# Altium PCB Copy of GAINS_PCB_2.PcbDoc
Units mil, origin at the board's own origin, x right, y up, seen from the top; angles counter-clockwise.
Board outline 1500 x 3000 mil, 2 copper layers (Top Layer, Bottom Layer), stack 61.756 mil thick; 18 components, 62 nets, 152 pads, 17 vias.
Unrouted connection lines stored in the file: 12.
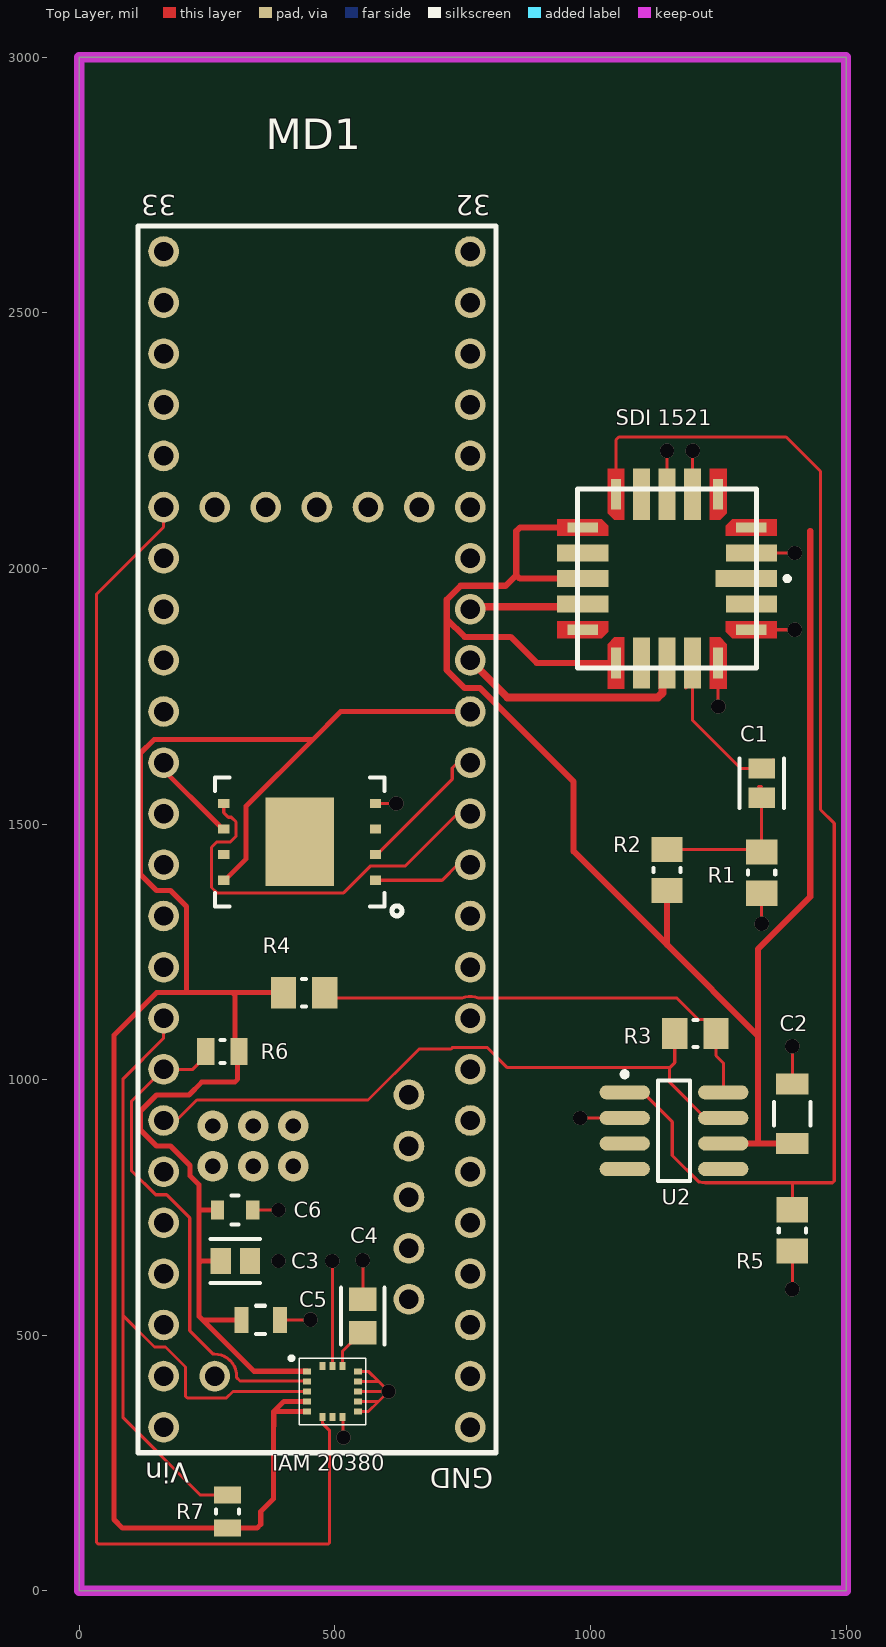
[diagram p0: Top Layer view]
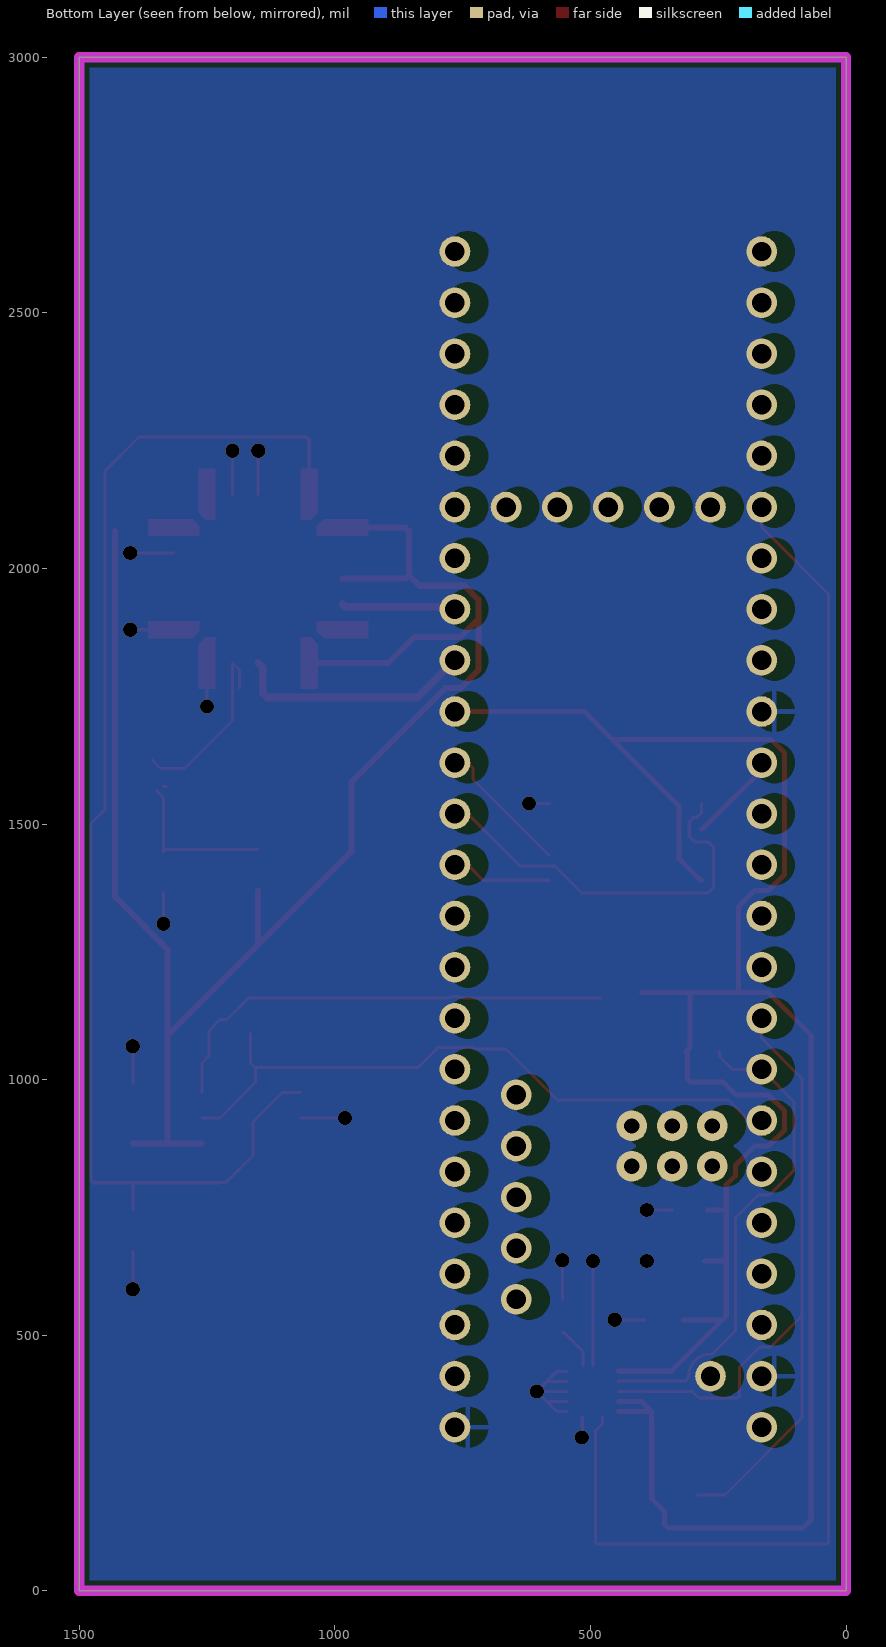
[diagram p1: Bottom Layer view, seen from below]

## Layer stack, top to bottom
Top Solder: solder mask 1, SM-001, Dk 4
Top Layer: signal copper 1.378
Dielectric 1: core 59, Core-043, Dk 4.3
Bottom Layer: signal copper 1.378
Bottom Solder: solder mask 1, SM-001, Dk 4

## Board outline
0,0 1500,0 1500,3000 0,3000

## Design rules (kind name [scope] priority, off if disabled: settings)
BoardOutlineClearance [All] p1: gap=10 ignorepadtopadclearanceinfootprint=FALSE except(0: Arc-SplitContinuation Track-SplitContinuation SMDPad-SplitContinuation THPad-SplitContinuation Via-SplitContinuation Fill-SplitContinuation Poly-SplitContinuation Region-SplitContinuation Text-SplitContinuation)
Clearance [All] p1: gap=10 ignorepadtopadclearanceinfootprint=FALSE except(0: Arc-Hole Track-Hole SMDPad-Hole THPad-Hole Via-Hole Fill-Hole Poly-Hole Region-Hole Text-Hole)
DiffPairsRouting [All] p1: maxlimit=10 minlimit=10 mostfreqgap=10 toplayer_minwidth=15 toplayer_maxwidth=15 toplayer_prefwidth=15 bottomlayer_minwidth=15 bottomlayer_maxwidth=15 bottomlayer_prefwidth=15 maxuncoupledlength=500
PlaneClearance [All] p1: clearance=10
PlaneConnect [All] p1: planeconnectstyle=Direct reliefexpansion=20 reliefentries=4 reliefconductorwidth=10 reliefairgap=10
PolygonConnect [All] p1: thpad.connectstyle=Relief thpad.reliefconductorwidth=10 thpad.reliefentries=4 thpad.polygonreliefangle="90 Angle" thpad.airgapwidth=10 smdpad.connectstyle=Direct smdpad.reliefconductorwidth=10 smdpad.reliefentries=4 smdpad.polygonreliefangle="90 Angle" smdpad.airgapwidth=10 via.connectstyle=Direct via.reliefconductorwidth=10 via.reliefentries=4 via.polygonreliefangle="90 Angle" via.airgapwidth=10
RoutingVias [All] p1: holewidth=13 width=25 viastyle="Through Hole" minholewidth=13 minwidth=25 maxholewidth=60 maxwidth=80
SolderMaskExpansion [All] p1: expansion=4 istentingtop=FALSE
Width [All] p1: maxlimit=100 minlimit=6 preferedwidth=6 minimp=50.000000 maximp=50.000000 favimp=50.000000
27 further rules are at their usual default settings.

## Classes and differential pairs
component class "SDI-1521L - Accelerometer": C1 C2 R1 R2 R3 R4 R5 "SDI 1521" U2
component class "IAM-20380 - Gyroscope": C3 C4 C5 C6 "IAM 20380"
differential pair AO: +AO_P -AO_N

## Components (designator, comment, footprint, x,y, rotation, side; value= is the part's Value field where it differs from the comment)
C1 "0.01uF" FP-GCM21B-0_15-IPC_C 1335,1580 r270 top
C2 "0.1uF" FP-GCM31C-0_2-e0_3_0_8-MFG 1395,933.07 r90 top
C3 "GCM21BR71E225KA73K" FP-GCM21B-0_15-IPC_C 305.31,645 r0 top
C4 "GRM21BR71H474KA88L" FP-GRM21B-0_1-IPC_B 555,537.43 r90 top
C5 "GCM21BR72A104KA37L" FP-GCM21B-0_15-MFG 355,530 r0 top
C6 "GCJ21BR72E103KXJ3L" FP-GCJ21B-0_2-MFG 305,745 r0 top
"IAM 20380" "IAM-20380" "Gyro - IAM20380" 495.2,390 r0 top (schematic designator *)
MD1 "TEENSY 4.1" Teensy4_1 465,2120 r90 top
R1 "5k" RESC2013X50X30ML20T20 1335,1405 r90 top
R2 "5k" RESC2013X50X30ML20T20 1150,1410 r90 top
R3 "5k" RESC2013X50X30ML20T20 1205.35,1090 r0 top
R4 "5k" RESC2013X50X30ML20T20 440,1170 r180 top
R5 "4.7k" RESC2013X60X30ML20T20 1395,705 r90 top
R6 "10k" RESC2013X50X30LL20T20 280,1055 r0 top
R7 "10k" RESC2013X50X30LL20T20 290,155 r270 top
"SDI 1521" "SDI-1521L" "SDI 1521L" 1150,1980 r270 top (schematic designator U1)
U2 "LT1413" LT-S8-8_M 1163.54,900 r0 top
? "GD5F1GQ4UFYIGY" SON127P800X80_HS-9N 431.38,1465 r180 top

## Footprints (in the part's own frame and the unit in brackets; to place one, negate y for a bottom-side part, rotate by r counter-clockwise, add the part's x,y. Pads: shape width x height; smd on the part's side, far side on the other; paste and mask are expansions set on the pad)
FP-GCJ21B-0_2-MFG [mm]
  rect 0.65x0.95 smd paste+0 mask+0: 1(-0.875,0) 2(0.875,0)
  silkscreen extent -0.18,-0.72 0.18,0.72, body extent -1.3,-0.82 1.3,0.82, height 0.25
FP-GCM21B-0_15-IPC_C [mil]
  rect 39.6x51.5 smd paste+0 mask+0: 1(-28.59,0) 2(28.59,0)
  silkscreen extent -48,-43 48,43, body extent -52,-31 52,31, height 10
FP-GCM21B-0_15-MFG [mm]
  rect 0.7x1.3 smd paste+0 mask+0: 1(-0.95,0) 2(0.95,0)
  silkscreen extent -0.23,-0.7 0.23,0.7, body extent -1.4,-0.8 1.4,0.8, height 0.25
FP-GCM31C-0_2-e0_3_0_8-MFG [mm]
  rect 1.05x1.6 smd paste+0 mask+0: 1(-1.475,0) 2(1.475,0)
  silkscreen extent -0.58,-0.9 0.58,0.9, body extent -2.1,-1 2.1,1, height 0.25
FP-GRM21B-0_1-IPC_B [mil]
  rect 45.58x53.63 smd paste+0 mask+0: 1(-32.57,0) 2(32.57,0)
  silkscreen extent -55,-43 55,43, body extent -65,-37 65,37, height 10
"Gyro - IAM20380" [mm]
  rect 0.4x0.3 smd mask+0.05: 1(-1.265,1) 2(-1.265,0.5) 3(-1.265,0) 4(-1.265,-0.5) 5(-1.265,-1) 9(1.265,-1) 10(1.265,-0.5) 11(1.265,0) 12(1.265,0.5) 13(1.265,1)
  rect 0.3x0.4 smd mask+0.05: 6(-0.5,-1.265) 7(0,-1.265) 8(0.5,-1.265) 14(0.5,1.265) 15(0,1.265) 16(-0.5,1.265)
  silkscreen extent -2.1,-1.65 1.65,1.72
LT-S8-8_M [mm] "SOIC, 8-Leads, Body 4.9x3.9mm, Pitch 1.27mm, IPC Low Density"
  oval 2.5x0.7 smd: 1(-2.45,1.905) 2(-2.45,0.635) 3(-2.45,-0.635) 4(-2.45,-1.905) 5(2.45,-1.905) 6(2.45,-0.635) 7(2.45,0.635) 8(2.45,1.905)
  silkscreen extent -2.57,-2.5 0.8,2.93, body extent -2,-2.5 2,2.5, height 1.76
RESC2013X50X30LL20T20 [mm] "Chip Resistor, 2-Leads, Body 2.00x1.25mm, IPC High Density"
  rect 0.85x1.35 smd: 1(-0.825,0) 2(0.825,0)
  silkscreen extent -0.1,-0.58 0.1,0.58, body extent -1.1,-0.72 1.1,0.72, height 0.5
RESC2013X50X30ML20T20 [mm] "Chip Resistor, 2-Leads, Body 2.00x1.25mm, IPC Low Density"
  rect 1.25x1.55 smd: 1(-1.025,0) 2(1.025,0)
  silkscreen extent -0.1,-0.67 0.1,0.67, body extent -1.1,-0.72 1.1,0.72, height 0.5
RESC2013X60X30ML20T20 [mm] "Chip Resistor, 2-Leads, Body 2.00x1.25mm, IPC Low Density"
  rect 1.25x1.55 smd: 1(-1.025,0) 2(1.025,0)
  silkscreen extent -0.1,-0.67 0.1,0.67, body extent -1.1,-0.72 1.1,0.72, height 0.6
"SDI 1521L" [mm]
  rect 0.84x3.05 smd: 1(0,3.935)
  rect 0.84x2.54 smd: 2(-1.27,4.19) 10(-1.27,-4.19) 11(0,-4.19) 12(1.27,-4.19) 20(1.27,4.19)
  rect 0.5x1.524 smd: 3(-2.54,4.19) 9(-2.54,-4.19) 13(2.54,-4.19) 19(2.54,4.19)
  round 0.025 smd: 3(2.54,4.19) 4(4.19,2.54) 8(4.19,-2.54) 9(2.54,-4.19) 13(-2.54,-4.19) 14(-4.19,-2.54) 18(-4.19,2.54) 19(-2.54,4.19)
  rect 1.524x0.5 smd: 4(-4.19,2.54) 8(-4.19,-2.54) 14(4.19,-2.54) 18(4.19,2.54)
  rect 2.54x0.84 smd: 5(-4.19,1.27) 6(-4.19,0) 7(-4.19,-1.27) 15(4.19,-1.27) 16(4.19,0) 17(4.19,1.27)
  Top Layer region: -2.96,5.46 -2.12,5.46 -2.12,2.92 -2.63,2.92 -2.96,3.25
  Top Layer region: -5.46,2.96 -5.46,2.12 -2.92,2.12 -2.92,2.63 -3.25,2.96
  Top Layer region: -5.46,-2.96 -5.46,-2.12 -2.92,-2.12 -2.92,-2.63 -3.25,-2.96
  Top Layer region: -2.96,-5.46 -2.12,-5.46 -2.12,-2.92 -2.63,-2.92 -2.96,-3.25
  Top Layer region: 2.96,-5.46 2.12,-5.46 2.12,-2.92 2.63,-2.92 2.96,-3.25
  Top Layer region: 5.46,-2.96 5.46,-2.12 2.92,-2.12 2.92,-2.63 3.25,-2.96
  Top Layer region: 5.46,2.96 5.46,2.12 2.92,2.12 2.92,2.63 3.25,2.96
  Top Layer region: 2.96,5.46 2.12,5.46 2.12,2.92 2.63,2.92 2.96,3.25
  silkscreen extent -4.45,-4.45 4.45,6.07
SON127P800X80_HS-9N [mm] "SON, 8-Leads, Body 6.00x8.00mm, Pitch 1.27mm, Thermal Pad 3.40x4.30mm, IPC Medium Density"
  rect 0.55x0.45 smd: 1(-3.775,1.905) 2(-3.775,0.635) 3(-3.775,-0.635) 4(-3.775,-1.905) 5(3.775,-1.905) 6(3.775,-0.635) 7(3.775,0.635) 8(3.775,1.905)
  rect 3.4x4.4 smd paste-2.15: 9(0,0)
  silkscreen extent -5.08,-3.2 4.2,3.68, body extent -4.05,-3.05 4.05,3.05, height 0.8
Teensy4_1 [mil] "Mircocontroller"
  round 60 hole 37.99: 0(-1700,-300) 1(-1600,-300) 2(-1500,-300) 3(-1400,-300) 4(-1300,-300) 5(-1200,-300) 6(-1100,-300) 7(-1000,-300) 8(-900,-300) 9(-800,-300) 10(-700,-300) 11(-600,-300) 12(-500,-300) 13(-500,300) 14(-600,300) 15(-700,300) 16(-800,300) 17(-900,300) 18(-1000,300) 19(-1100,300) 20(-1200,300) 21(-1300,300) 22(-1400,300) 23(-1500,300) 24(-300,-300) 25(-200,-300) 26(-100,-300) 27(0,-300) 28(100,-300) 29(200,-300) 30(300,-300) 31(400,-300) 32(500,-300) 33(500,300) 34(400,300) 35(300,300) 36(200,300) 37(100,300) 38(0,300) 39(-100,300) 40(-200,300) 41(-300,300) 42(-1800,300) 43(-1700,300) 44(-1600,300) 45(-400,300) 46(-1800,-300) 47(-400,-300) 48(-1700,200) 55(-1550,-180) 56(-1450,-180) 57(-1350,-180) 58(-1250,-180) 59(-1150,-180) 60(0,200) 61(0,100) 62(0,0) 63(0,-100) 64(0,-200)
  round 60 hole 30: 49(-1289.37,203.54) 50(-1210.63,203.54) 51(-1289.37,124.8) 52(-1210.63,124.8) 53(-1289.37,46.06) 54(-1210.63,46.06)
  silkscreen extent -1850,-350 550,350

## Part data
C1: library part CMP-06035-043554-1, "Ceramic Capacitor for Automotive 10nF ±1% 50VDC X8G 0805 Embossed T/R (GCM21B5G1H103FA16K)"
C2: library part CMP-06035-040557-1, "Ceramic Capacitor for Automotive 100nF ±1% 50VDC C0G 1206 Embossed T/R (GCM31C5C1H104FA16L)"
C3: library part CMP-06035-054411-1, "Ceramic Capacitor for Automotive 2.2uF ±10% 25VDC X7R 0805 Embossed T/R", Capacitance=2.2uF, Case Code (Imperial)=0805, Case Code (Metric)=2012, Dielectric=X7R, Max Operating Temperature=125°C, Min Operating Temperature=-55°C, Package Quantity=10000, Tolerance=10%, Voltage Rating=25V, Case/Package=0805, Depth=1.25mm, Height=1.25mm, Lead Free="Lead Free", Length=2mm, Mount="Surface Mount", Packaging="Tape and Reel", Radiation Hardening=No, Termination=SMD/SMT, Voltage Rating (DC)=25V, Width=1.25mm
C4: library part CMP-06035-060025-1, "Chip Multilayer Ceramic Capacitors for General Purpose, 0805, 0.47uF, X7R, 15%, 10%, 50V", Capacitance=470nF, Case Code (Imperial)=0805, Case Code (Metric)=2012, Dielectric=X7R, Max Operating Temperature=125°C, Min Operating Temperature=-55°C, Package Quantity=1, Tolerance=10%, Voltage=50V, Case/Package=0805, Construction=Flat, Depth=1.25mm, Height=1.25mm, Lead Free="Lead Free", Length=2mm, Material=Ceramic, Mount="Surface Mount", Packaging="Tape and Reel", REACH SVHC="No SVHC", Series=GRM, Size=1.25mm, Termination=SMD/SMT, Thickness=0.053inch, Voltage Rating=50V, Voltage Rating (DC)=50V, Width=0.049inch
C5: library part CMP-2007-03364-2, "Ceramic Capacitor for Automotive 100nF ±10% 100VDC X7R 0805 Embossed T/R", Capacitance=100nF, Case Code (Imperial)=0805, Case Code (Metric)=2012, Dielectric=X7R, Max Operating Temperature=125°C, Min Operating Temperature=-55°C, Package Quantity=1, Ratings=AEC-Q200, Tolerance=10%, Voltage=100V, Case/Package=0805, Depth=1.25mm, Height=1.25mm, Lead Free="Lead Free", Length=2mm, Mount="Surface Mount", Packaging="Tape and Reel", Radiation Hardening=No, REACH SVHC="No SVHC", Termination=SMD/SMT, Thickness=0.055inch, Voltage Rating=100V, Voltage Rating (DC)=100V, Width=0.049inch
C6: library part CMP-2007-03220-2, "CAP CER 10000PF 250V X7R 0805", Capacitance=10nF, Case Code (Imperial)=0805, Case Code (Metric)=2012, Dielectric=X7R, Max Operating Temperature=125°C, Min Operating Temperature=-55°C, Package Quantity=3000, Ratings=AEC-Q200, Tolerance=10%, Voltage Rating=250V, Case/Package=0805, Features="Soft Termination", Length=0.079inch, Mount="Surface Mount", Packaging="Tape and Reel", REACH SVHC="No SVHC", Termination=SMD/SMT, Thickness=0.057inch, Voltage Rating (DC)=250V, Width=0.049inch
"IAM 20380": "IAM-20380 High Performance Gyroscope"
MD1: library part 080115a1ce54750370cf87ec145ee29, "TEENSY 4.1 (HEADERS)"
R1 R2 R3 R4: library part CMP-2001-04239-1, "CRCW08055K00FKTA", Manufacturer="Vishay Dale", Part Number=CRCW08055K00FKTA
R5: library part CMP-2001-02407-1, "RK73H2ATTD4701F", Manufacturer="KOA Speer", Part Number=RK73H2ATTD4701F
R6 R7: library part CMP-2001-04257-1, "CRCW080510K0JNTA", Manufacturer="Vishay Dale", Part Number=CRCW080510K0JNTA
"SDI 1521": library part SDI1521L, "SDI1521L Accelerometer +/- 2G"
U2: library part CMP-0359-02913-2, "Dual Channel, Precision Single Supply Operational Amplifier, 0.95 MHz Typical GBW, 0.3 V/us Typical SR, 3 to 22 V, 8-Pin SOIC (S8-8), Commercial, Pb-Free, Reel", Manufacturer="Linear Technology", PartNumber=LT1413S8#TRPBF, Channels (#)=2, ComponentLink1Description="Manufacturer URL", ComponentLink1URL=http://www.linear.com/, ComponentLink2Description=Datasheet, ComponentLink2URL=http://cds.linear.com/docs/en/datasheet/lt1413.pdf, ComponentLink3Description="Package Specification", ComponentLink3URL=http://cds.linear.com/docs/en/packaging/05081610_G_SO8.pdf, DatasheetVersion="Rev. 0", GBW (MHz) Typical=0.95, Is (mA) Typical=0.33, Linear Technology Part Number=LT1413, Mounting Technology="Surface Mount", PackageDescription="8-Pin Plastic Small Outline, Body 4.9 x 3.9 mm, Pitch 1.27 mm", PackageReference=LT-S8-8, PackageVersion="Rev G", Packing=Reel, RevisionNote="URLs updated", RoHS=Pb-Free, SR (V/us) Typical=0.3, Type=VFB, Vos (mV) Typical=0.05, Vs Max (V)=22, Vs Min (V)=3
?: "FLASH - NAND Memory IC 1Gbit SPI - Quad I/O 120 MHz 8-WSON (6x8) - GD5F1GQ4UFYIGY", Supplier Part Number 1=1970-1081-1-ND, Supplier 1=Digi-Key

## Via types
v1: diameter 28, hole 28, Top Layer to Bottom Layer, 17 vias

## Nets (pads, with @x,y where several pads share a name; then routed paths per layer and width w, separated by ;. In a path a pad name is that pad's centre, name@x,y a point inside that pad or via, vN(x,y) a via of type N, cw(c..) or ccw(c..) an arc to the next point about the centre after c; other vN are vias at no path point)
3V3: "IAM 20380.1" "IAM 20380.4" "IAM 20380.5" "IAM 20380.16" ?.8 C3.1 C5.1 C6.1 MD1.47 R4.2 R6.2 R7.2 | length 4773.5
  Top Layer w10: C6.1 234.22,745 ; C3.1 238.2,645 234.22,641.02 ; ?.8 284.72,1390 326.58,1431.86 326.58,1534.96 456.62,1665 ; C5.1 241.27,530 ; R4.2 299.14,1170 ; 445.39,350.63 380.63,350.63 ; 445.39,370.32 400.32,370.32 380.63,350.63 ; 445.39,429.37 341.9,429.37 241.27,530 ; MD1.47@740,1720 511.62,1720 456.62,1665 ; 210,1170 299.14,1170 ; 210,1170 210,1338.64 178.64,1370 151.36,1370 120,1401.36 120,1638.64 146.36,1665 456.62,1665 ; 210,1170 151.36,1170 68,1086.64 68,139.26 84.74,122.52 R7.2 347.52,122.52 355,130 355,155 380,180 380,323.13 380.63,322.5 380.63,350.63 ; 234.22,641.02 234.22,645 234.22,745 ; 234.22,641.02 234.22,537.04 241.27,530 ; 234.22,745 234.22,794.22 216.46,811.99 216.46,832.18 178.64,870 151.36,870 120,901.36 120,938.64 151.36,970 214.54,970 239.54,995 304.14,995 310,1000.86 310,1052.52 R6.2 305,1062.48 305,1160 305,1164.14 299.14,1170
5V: "SDI 1521.3" "SDI 1521.9" "SDI 1521.11" "SDI 1521.14" C2.1 R2.1 U2.6 | length 3434.3
  Top Layer w12: 955,2075 950,2080 862.03,2080 855,2072.97 855,1987.03 ; 985.04,1815.04 985,1815 ; 985.04,1980 862.03,1980 855,1987.03 ; 1033.5,1815 985,1815 ; R2.1 1150,1263.45 ; U2.6 1327.5,875 ; C2.1 1327.5,875 ; 1430,2072.97 1430,1357.57 1327.5,1255.07 1327.5,1085.95 ; 719,1900.95 719,1800.95 753.95,1766 784.05,1766 967.03,1583.03 967.03,1446.43 1150,1263.45 ; 719,1900.95 753.95,1866 844,1866 895,1815 985,1815 ; 719,1900.95 719,1939.05 745.95,1966 833.97,1966 855,1987.03 ; 1150,1263.45 1327.5,1085.95 ; 1327.5,875 1327.5,1085.95
AO_N: "SDI 1521.16" MD1.24 | length 472.1
  Top Layer w15: MD1.24 837.46,1747.54 1132.18,1747.54 1140.96,1756.33 1140.96,1806 1150,1815.04
AO_P: "SDI 1521.12" MD1.25 | length 224.2
  Top Layer w15: MD1.25 770,1925 980.04,1925 985.04,1930
FLASH_CS: ?.1 MD1.10 | length 172.4
  Top Layer w6: ?.1 710,1390 MD1.10@740,1420
FLASH_MISO: ?.2 MD1.12 | length 249.7
  Top Layer w6: ?.2 581.97,1440 729.67,1587.7 729.67,1609.67 740,1620 MD1.12@741.59,1618.41
FLASH_MOSI: ?.5 MD1.11 | length 764.7
  Top Layer w6: ?.5 282.76,1522.14 291.71,1513.19 297.63,1513.19 306.58,1504.24 306.58,1475.76 295.83,1465 269.69,1465 258.93,1454.24 258.93,1375.76 269.3,1365.39 517.32,1365.39 570.07,1418.14 638.14,1418.14 740,1520 MD1.11@740,1517.37
GND: "IAM 20380.8" "IAM 20380.9" "IAM 20380.10" "IAM 20380.11" "IAM 20380.12" "IAM 20380.13" "IAM 20380.15" "SDI 1521.2" "SDI 1521.5" "SDI 1521.6" "SDI 1521.18" "SDI 1521.19" ?.4 C2.2 C3.2 C4.2 C5.2 C6.2 MD1.43 MD1.45 MD1.46 R1.1 R5.1 U2.2 | length 1482.6
  Top Layer w6: C6.2@340.98,743.46 C6.2 v1(390,745) ; C5.2 v1(452.48,530) ; v1(495,645) 495.1,644.9 495.1,439.9 495.2,439.8 ; 514.88,340.2 515.94,339.14 515.94,301.06 v1(517,300) ; 545,350.63 565.63,350.63 585.32,370.32 ; 545,370.32 585.32,370.32 ; 545,390 v1(605,390) ; 545,409.68 585.32,409.68 ; 545,429.37 565.63,429.37 585.32,409.68 ; v1(554.85,646.71) 554.85,570.15 C4.2 ; ?.4 v1(620,1540) ; v1(980,925) U2.2 ; 1150,2144.96 v1(1150,2230) ; 1200,2144.96 v1(1200,2230) ; v1(1250,1730) 1250,1815.04 ; 1314.96,1880 v1@1396.49,1880 ; 1314.96,2030 v1@1396.49,2030 ; v1(1335,1305) R1.1 ; v1(1395,590) R5.1 ; C2.2 v1(1395,1065) ; 585.32,370.32 v1(605,390) ; 585.32,409.68 v1(605,390)
  other v1: 390,645 1400,1880 1400,2030
GYRO_INT: "IAM 20380.6" MD1.38 | length 2790.2
  Top Layer w6: MD1.38 165,2080.81 33.83,1949.64 33.83,94.68 37.35,91.17 486.49,91.17 490,94.68 490,313.23 476.29,326.94 476.29,339.42 475.51,340.2
I_T: "SDI 1521.8" R5.2 U2.1 | length 2511.5
  Top Layer w6: 1050,2144.96 1050,2251.49 1055.51,2257 1383,2257 1450,2190 1450,1528.18 1477,1501.18 1477,801.74 1473.49,798.22 1395,798.22 ; U2.1 1102.52,975 1160.06,917.46 1160.06,851.64 1211.7,800 1214.97,800 ccw(c1224.57,825) 1224.57,798.22 1395,798.22 ; R5.2 1395,798.22
Net*_7: "IAM 20380.7"
Net*_14: "IAM 20380.14" C4.1 | length 84
  Top Layer w6: 514.88,439.8 514.88,468.77 550.98,504.87 C4.1
Net_3: ?.3
Net_7: ?.7
NetC1_1: "SDI 1521.17" C1.1 C1.2 R1.2 R2.2 | length 688.4
  Top Layer w6: R2.2 1330,1450.35 R1.2 C1.2 C1.2@1348.59,1565 ; 1186.46,1766.58 1186.46,1801.5 1200,1815.04 1200,1702.64 1294.05,1608.59 C1.1 1340.95,1608.59 C1.1@1357.75,1625.39 ; 1329.05,1573.59 1335,1573.59
NetMD1_0: MD1.0
NetMD1_1: MD1.1
NetMD1_2: MD1.2
NetMD1_3: MD1.3
NetMD1_4: MD1.4
NetMD1_5: MD1.5
NetMD1_6: MD1.6
NetMD1_7: MD1.7
NetMD1_8: MD1.8
NetMD1_9: MD1.9
NetMD1_14: MD1.14
NetMD1_15: MD1.15
NetMD1_16: MD1.16
NetMD1_17: MD1.17
NetMD1_21: MD1.21
NetMD1_22: MD1.22
NetMD1_23: MD1.23
NetMD1_26: MD1.26
NetMD1_27: MD1.27
NetMD1_28: MD1.28
NetMD1_29: MD1.29
NetMD1_30: MD1.30
NetMD1_31: MD1.31
NetMD1_32: MD1.32
NetMD1_33: MD1.33
NetMD1_34: MD1.34
NetMD1_35: MD1.35
NetMD1_36: MD1.36
NetMD1_37: MD1.37
NetMD1_39: MD1.39
NetMD1_40: MD1.40
NetMD1_41: MD1.41
NetMD1_42: MD1.42
NetMD1_44: MD1.44
NetMD1_48: MD1.48
NetR3_2: R3.2 R4.1 U2.8 | length 919.5
  Top Layer w6: R4.1@480.35,1160 749.22,1160 cw(c765,1120) 780.78,1160 1168.5,1160 1210.99,1117.51 1224.1,1117.51 1245.71,1095.91 R3.2 1245.71,1046.79 1260,1032.5 U2.8
NetU1_1: "SDI 1521.1"
NetU1_4: "SDI 1521.4"
NetU1_7: "SDI 1521.7"
NetU1_10: "SDI 1521.10"
NetU1_13: "SDI 1521.13"
NetU1_15: "SDI 1521.15"
NetU1_20: "SDI 1521.20"
SCL: "IAM 20380.2" MD1.19 R6.1 | length 978.8
  Top Layer w6: R6.1 247.52,1045.16 222.36,1020 MD1.19 102,957 102,822.19 149.42,774.77 171.04,774.77 216.22,729.59 216.22,508.78 262,463 264.49,463 cw(c265,420) 308,419.49 308,417 314.54,410.46 444.61,410.46 445.39,409.68
SCLK: ?.6 MD1.13 | length 196.6
  Top Layer w10: MD1.13@140,1620 150.79,1620 280.79,1490 ?.6
SDA: "IAM 20380.3" MD1.18 R7.1 | length 1546.1
  Top Layer w6: MD1.18 165,1080.81 86,1001.81 86,538.19 ; R7.1 236.71,187.48 86,338.19 86,538.19 ; 445.39,390 300.74,390 287.74,377 211.51,377 208,380.51 208,437.81 168.81,477 147.19,477 86,538.19
V_T: MD1.20 R3.1 U2.7 | length 1299.1
  Top Layer w6: MD1.20 190,920 230,960 565,960 665,1060 727.7,1060 730.7,1063 797.78,1063 803.64,1057.14 837.53,1023.25 1155,1023.25 ; R3.1 1165,1033.25 1155,1023.25 ; U2.7 1224.57,925 1155,994.57 1155,1023.25
pads on no net: ?.9 MD1.49 MD1.50 MD1.51 MD1.52 MD1.53 MD1.54 MD1.55 MD1.56 MD1.57 MD1.58 MD1.59 MD1.60 MD1.61 MD1.62 MD1.63 MD1.64 U2.3 U2.4 U2.5

## Polygon pours and split planes (outlines as drawn)
GND on Bottom Layer "GND_L02_P000" (solid, pour order 0): 0,3000 1500,3000 1500,0 0,0

## Keep-outs
Keep-Out Layer:
  the board outline again, w20

## Text inside footprints (layer, text, board x,y; h text height)
MD1: Top Overlay "GND" at 810,240 h39.37 r180; Top Overlay "32" at 805,2730 h39.37 r180; Top Overlay "33" at 190,2730 h39.37 r180; Top Overlay "Vin" at 215,250 h39.37 r180